# Altium PCB Programmer.PcbDoc
Units mm, origin at the board's own origin, x right, y up, seen from the top; angles counter-clockwise.
Board outline 78 x 41 mm, 2 copper layers (Top Layer, Bottom Layer); 31 components, 29 nets, 87 pads, 1210 vias.
Unrouted connection lines stored in the file: 10.
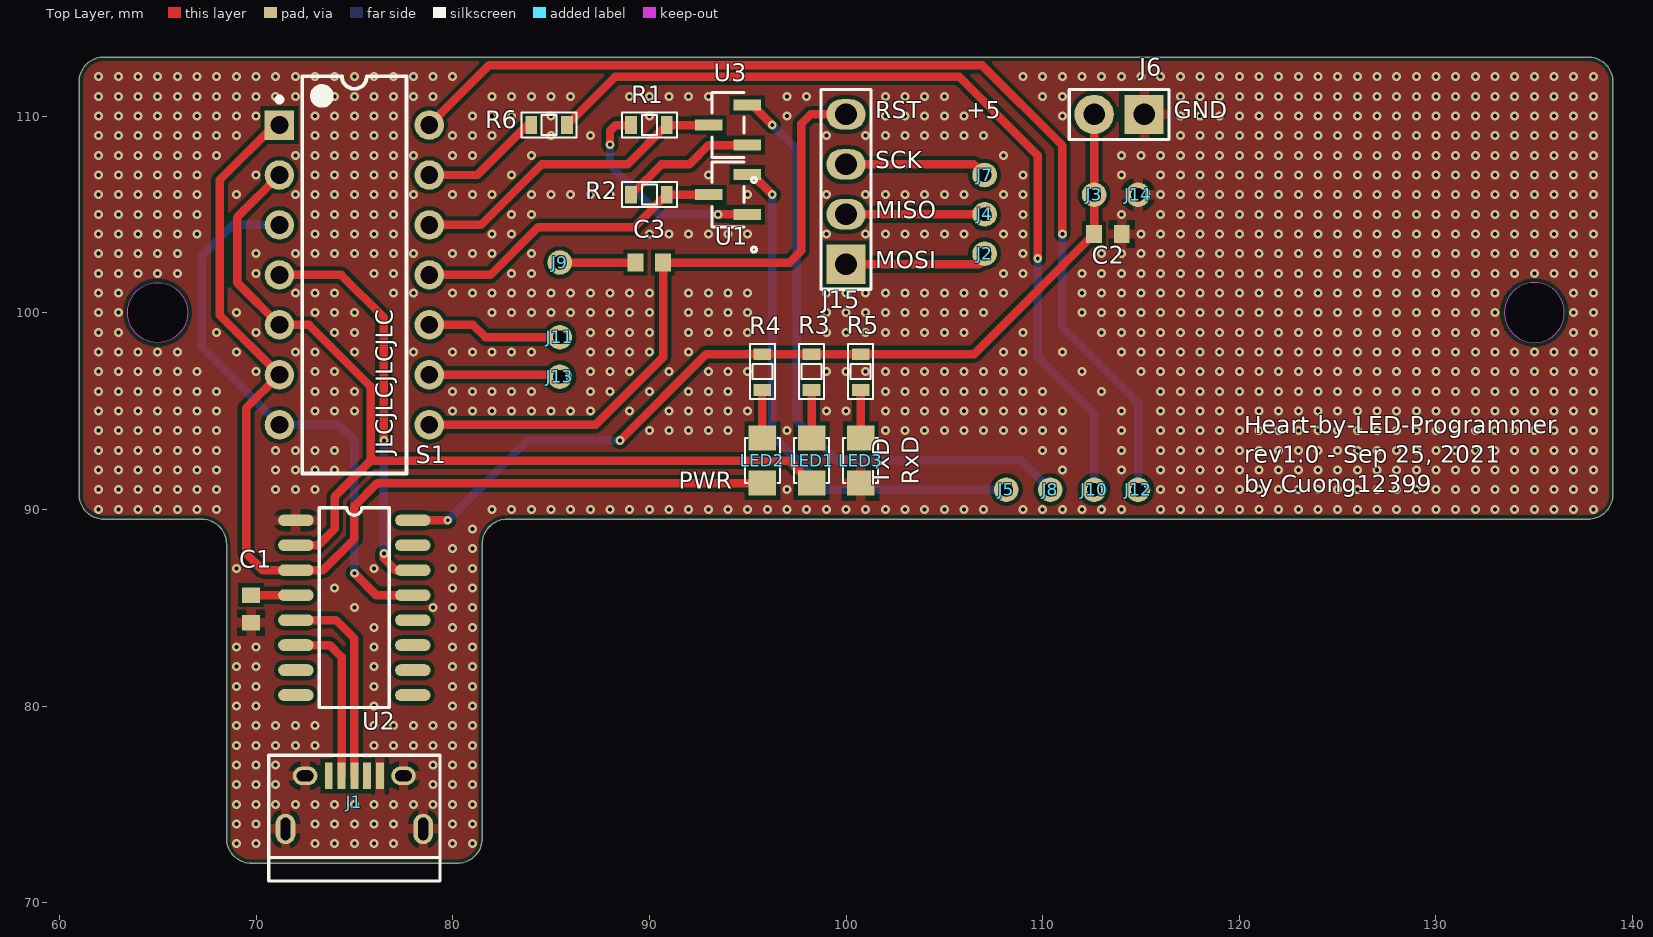
[diagram p0: Top Layer view]
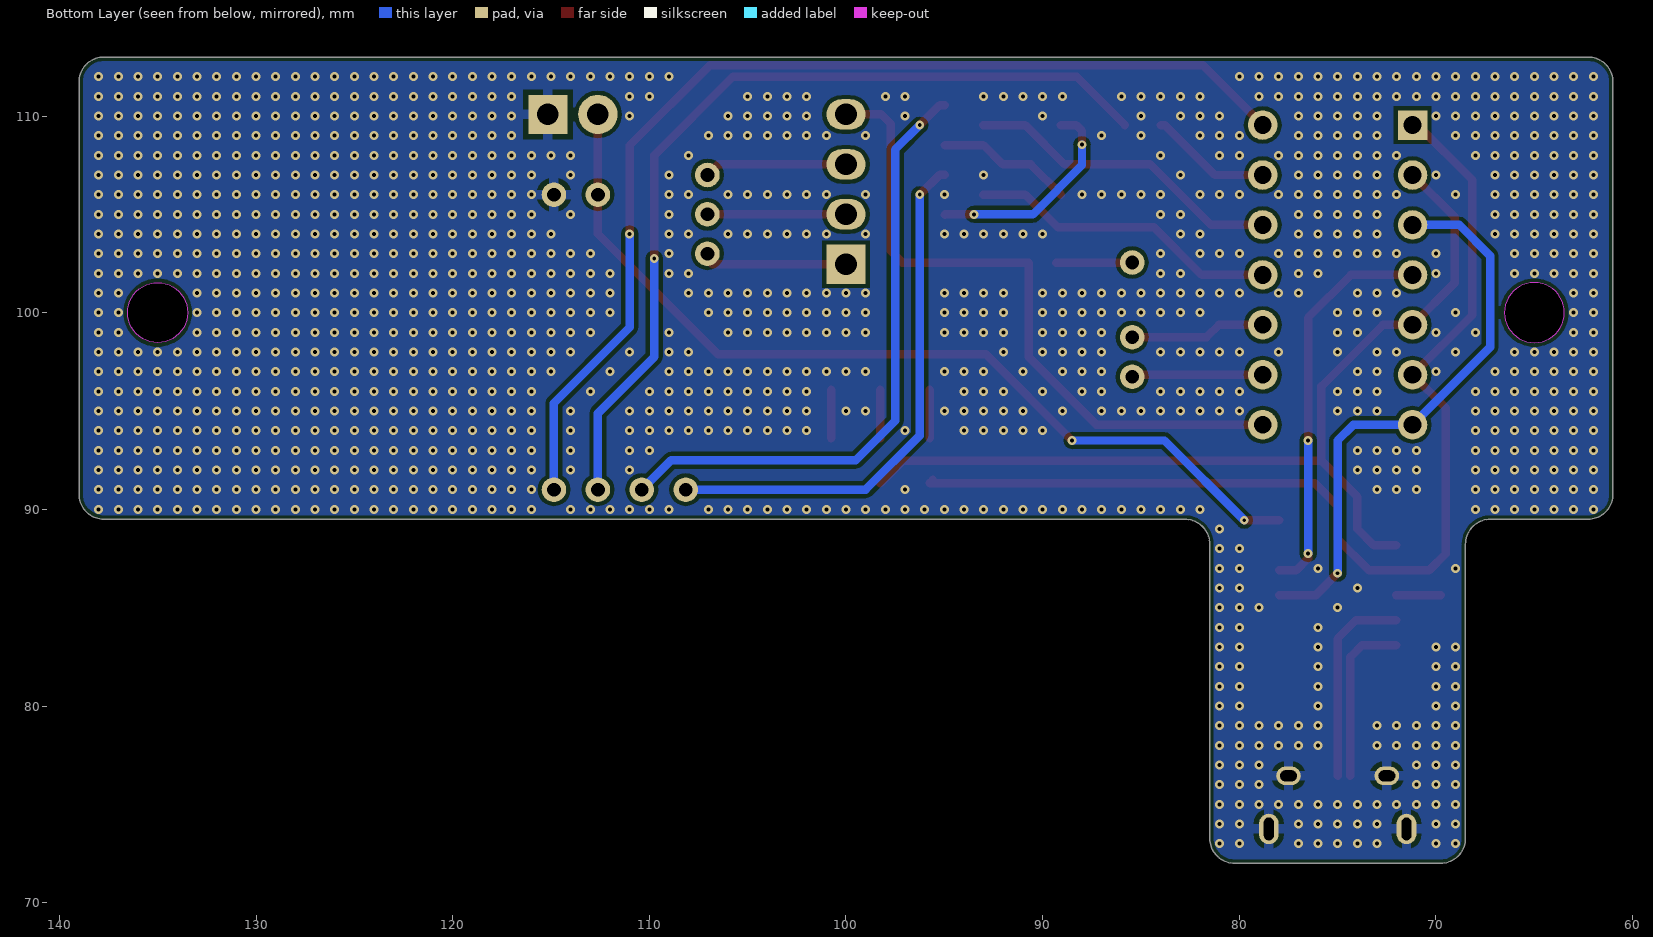
[diagram p1: Bottom Layer view, seen from below]
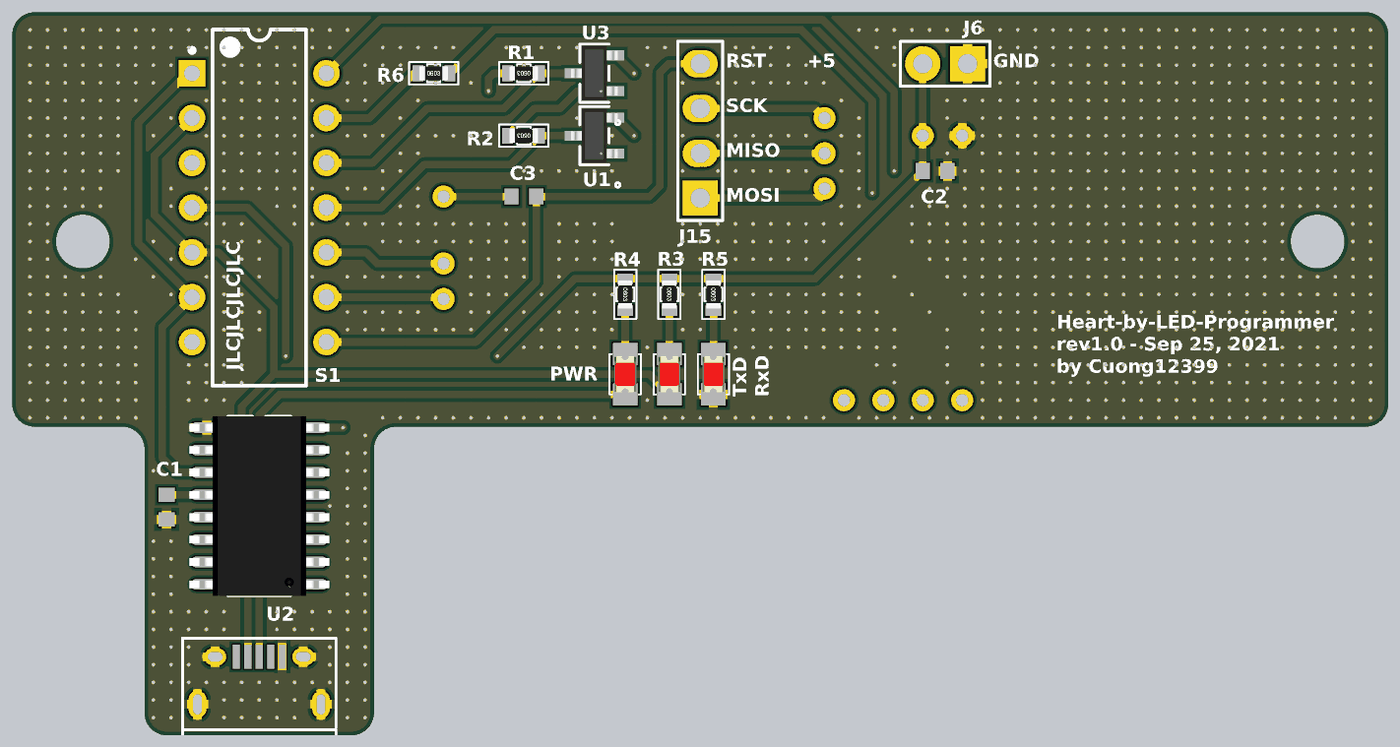
[diagram p2: 3D render of the assembled board from above, using the file's embedded part models]

## Layer stack, top to bottom
Top Solder: solder mask 0.0102, Solder Resist, Dk 3.5
Top Layer: signal copper 0.0356
Dielectric 1: dielectric 0.32, FR-4, Dk 4.8
Bottom Layer: signal copper 0.0356
Bottom Solder: solder mask 0.0102, Solder Resist, Dk 3.5

## Board outline
68.5,88.23 ccw(c67.23,88.23) 67.23,89.5 62.27,89.5 cw(c62.27,90.77) 61,90.77 61,111.73 cw(c62.27,111.73) 62.27,113 137.73,113 cw(c137.73,111.73) 139,111.73 139,90.77 cw(c137.73,90.77) 137.73,89.5 82.77,89.5 ccw(c82.77,88.23) 81.5,88.23 81.5,73.27 cw(c80.23,73.27) 80.23,72 69.77,72 cw(c69.77,73.27) 68.5,73.27
cut-out: 133.475,100 ccw(c135,100) 135,98.475 ccw(c135,100) 136.525,100 ccw(c135,100) 135,101.525 ccw(c135,100)
cut-out: 65,98.475 cw(c65,100) 63.475,100 cw(c65,100) 65,101.525 cw(c65,100) 66.525,100 cw(c65,100)

## Design rules (kind name [scope] priority, off if disabled: settings)
BoardOutlineClearance [All] p1: gap=0.2 ignorepadtopadclearanceinfootprint=FALSE except(0.4: Arc-SplitBarrior Arc-SplitContinuation Track-SplitBarrior Track-SplitContinuation SMDPad-SplitBarrior SMDPad-SplitContinuation THPad-SplitBarrior THPad-SplitContinuation Via-SplitBarrior Via-SplitContinuation Fill-SplitBarrior Fill-SplitContinuation Poly-SplitBarrior Poly-SplitContinuation Region-SplitBarrior Region-SplitContinuation Text-SplitBarrior Text-SplitContinuation)
Clearance [All] p1: gap=0.2 ignorepadtopadclearanceinfootprint=FALSE except(0.089: Arc-Arc Arc-Track Arc-SMDPad Track-Track Track-SMDPad SMDPad-SMDPad; 0.127: Arc-Via Track-Via SMDPad-Via THPad-Via Via-Via; 0.254: Arc-Text Track-Text SMDPad-Text THPad-Text Via-Text Fill-Text Poly-Text Region-Text Text-Text)
HoleSize [All] p1: absolutevalues=TRUE maxlimit=6.3 minlimit=0.2 maxpercent=80.000 minpercent=20.000
MinimumAnnularRing [All] p1: minimumring=0.076
MinimumSolderMaskSliver [All] p1: minsoldermaskwidth=0.1
PolygonConnect PolygonConnect_1 [All] p1: thpad.connectstyle=Relief thpad.reliefconductorwidth=0.508 thpad.reliefentries=4 thpad.polygonreliefangle="90 Angle" thpad.airgapwidth=0.254 smdpad.connectstyle=Relief smdpad.reliefconductorwidth=0.508 smdpad.reliefentries=4 smdpad.polygonreliefangle="90 Angle" smdpad.airgapwidth=0.254 via.connectstyle=Direct via.reliefconductorwidth=0.508 via.reliefentries=4 via.polygonreliefangle="90 Angle" via.airgapwidth=0.254
RoutingCorners [All] p1: cornerstyle=Round minsetback=2.54 maxsetback=2.54
RoutingVias [All] p1: holewidth=0.3 width=0.6 viastyle="Through Hole" minholewidth=0.2 minwidth=0.45 maxholewidth=1 maxwidth=2
SilkToSilkClearance [All] p1: silktosilkclearance=0.1
SilkToSolderMaskClearance [IsPad] p1: minsilkscreentomaskgap=0.1 clearancetoexposedcopper=TRUE
SolderMaskExpansion [All] p1: expansion=0.102
Width [All] p1: maxlimit=2.54 minlimit=0.432 preferedwidth=0.508
25 further rules are at their usual default settings.

## Components (designator, comment, footprint, x,y, rotation, side; value= is the part's Value field where it differs from the comment)
C1 "Cap Semi" 1608[0603] 69.75,84.935 r90 top value=100nF
C2 "Cap Semi" 1608[0603] 113.316,104 r180 top value=100nF
C3 "Cap Semi" 1608[0603] 90,102.55 r0 top value=100nF
J1 "USB" USB-MICRO-B-1 75,73.75 r0 top
J2 "Test Pin" P50-J1 107.047,103 r90 top
J3 "Test Pin" P50-J1 112.616,106 r90 top
J4 "Test Pin" P50-J1 107.047,105 r90 top
J5 "Test Pin" P50-J1 108.148,91 r90 top locked
J6 "Header" "Header 1x2 Pin 2.54mm" 115.156,110.08 r180 top
J7 "Test Pin" P50-J1 107.047,107 r90 top
J8 "Test Pin" P50-J1 110.382,91 r90 top locked
J9 "Test Pin" P50-J1 85.45,102.55 r90 top locked
J10 "Test Pin" P50-J1 112.616,91 r90 top locked
J11 "Test Pin" P50-J1 85.45,98.754 r90 top locked
J12 "Test Pin" P50-J1 114.85,91 r90 top locked
J13 "Test Pin" P50-J1 85.45,96.74 r90 top locked
J14 "Test Pin" P50-J1 114.85,106 r90 top
J15 "Header" "HEADER 1X4PIN 2.54mm" 100,102.46 r90 top
LED1 "LED" LED-0805-Red 98.248,93.616 r270 top value="LED 3 - 5 ly 2 Colour"
LED2 "LED" LED-0805-Red 95.748,93.616 r270 top value="LED 3 - 5 ly 2 Colour"
LED3 "LED" LED-0805-Red 100.748,93.616 r270 top value="LED 3 - 5 ly 2 Colour"
R1 "Res" RES-SMD-0603 90,109.54 r180 top value=12k
R2 "Res" RES-SMD-0603 90,106 r180 top value=12k
R3 "Res" RES-SMD-0603 98.248,97 r270 top value=10k
R4 "Res" RES-SMD-0603 95.748,97 r270 top value=10k
R5 "Res" RES-SMD-0603 100.748,97 r270 top value=10k
R6 "Res" RES-SMD-0603 84.889,109.54 r0 top value=470R
S1 "SW DIP-7" DIP-14 75,101.92 r0 top
U1 "BSS138LT1G" SOT23-3_ONS 94,106 r90 top locked
U2 "Serial IC" CH340C 75,85 r270 top
U3 "BSS138LT1G" SOT23-3_ONS 94,109.54 r90 top locked

## Footprints (in the part's own frame and the unit in brackets; to place one, negate y for a bottom-side part, rotate by r counter-clockwise, add the part's x,y. Pads: shape width x height; smd on the part's side, far side on the other; paste and mask are expansions set on the pad)
1608[0603] [mm] "Chip Capacitor, Body 1.6x0.8mm, IPC High Density"
  rect 0.8x0.9 smd: 1(-0.7,0) 2(0.7,0)
  body extent -0.87,-0.48 0.87,0.48, height 1.3
CH340C [mm]
  oval 0.6x1.8 smd: 1(-4.445,-2.972) 2(-3.175,-2.972) 3(-1.905,-2.972) 4(-0.635,-2.972) 5(0.635,-2.972) 6(1.905,-2.972) 7(3.175,-2.972) 8(4.445,-2.972) 9(4.445,2.972) 10(3.175,2.972) 11(1.905,2.972) 12(0.635,2.972) 13(-0.635,2.972) 14(-1.905,2.972) 15(-3.175,2.972) 16(-4.445,2.972)
  silkscreen extent -5.08,-1.78 5.08,1.78, body extent -5.1,-3.96 5.1,3.96, height 1.8
DIP-14 [mm] "DIP; 14 Leads; Row Spacing 7.62 mm; Pitch 2.54 mm"
  rect 1.5x1.5 hole 0.9: 1(-3.81,7.62)
  round 1.5 hole 0.9: 2(-3.81,5.08) 3(-3.81,2.54) 4(-3.81,0) 5(-3.81,-2.54) 6(-3.81,-5.08) 7(-3.81,-7.62) 8(3.81,-7.62) 9(3.81,-5.08) 10(3.81,-2.54) 11(3.81,0) 12(3.81,2.54) 13(3.81,5.08) 14(3.81,7.62)
  silkscreen extent -3.93,-10.1 2.65,10.1, body extent -3.6,-10.1 3.6,10.1, height 5.08
"Header 1x2 Pin 2.54mm" [mm]
  rect 2x2 hole 1.1 unplated: 1(0,0)
  round 2 hole 1.1 unplated: 2(2.54,0)
  silkscreen extent -1.27,-1.27 3.81,1.27
"HEADER 1X4PIN 2.54mm" [mm]
  rect 2x2 hole 1.1: 1(0,0)
  oval 1.55x2 hole 1.1: 2(2.54,0) 3(5.08,0) 4(7.62,0)
  silkscreen extent -1.27,-1.27 8.89,1.27
LED-0805-Red [mil]
  rect 50x55 smd: 1(0,0) 2(90,0)
  silkscreen extent 0,-35 90,35, body extent 5,-25 85,25, height 43
P50-J1 [mm]
  round 1.25 hole 0.7 unplated: 1(0,0)
RES-SMD-0603 [mm]
  rect 0.6x0.9 smd: 1(-0.889,0) 2(0.927,0)
  silkscreen extent -1.4,-0.64 1.4,0.64, body extent -0.8,-0.4 0.8,0.4, height 0.43
SOT23-3_ONS [mil]
  rect 22x55 smd paste+0 mask+0: 1(-40,-38.5) 2(40,-38.5) 3(0,38.5)
  silkscreen extent -115,-57 65,33, body extent -60,-52 60,52, height 44
USB-MICRO-B-1 [mm]
  rect 0.4x1.35 smd: 1(-1.3,2.7) 2(-0.65,2.7) 3(0,2.7) 4(0.65,2.7) 5(1.3,2.7)
  oval 1x1.55 hole 1.15 slot 0.5 at 0 deg: 6(-3.5,0) 6(3.5,0)
  oval 1.25x0.95 hole 0.55 slot 0.85 at 0 deg: 6(-2.5,2.7) 6(2.5,2.7)
  silkscreen extent -4.35,-2.65 4.35,3.75

## Part data
C1 C2 C3: "Capacitor (Semiconductor SIM Model)", LatestRevisionDate=29-May-2009, LatestRevisionNote="IPC-7351 Footprint Added.", PackageDescription="Chip Capacitor", PackageReference=C1206, Published=8-Jun-2000, Publisher="Altium Limited"
J1: library part USB-Micro-B_1, "MicroUSB 5pin TypeB SMD", ComponentLink1Description=Thegioiic, ComponentLink1URL=https://thegioiic.com/products/cong-usb-micro-b-dau-cai-5pin-smd-v1
J2 J3 J4 J5 J7 J8 J9 J10 J11 J12 J13 J14: library part P50-J1
J6: library part "Header 1x2Pin 2.54mm", "Header 1x2Pin 2.54mm"
J15: library part "Header 1x4Pin 2.54mm", "Header 1x4Pin 2.54mm"
LED1 LED2 LED3: library part "LED SMD"
R1 R2 R3 R4 R5 R6: library part Res-SMD, "Resistor", Manufacturer="Generic Components", Class=Passive, Published=08/06/2000, Publisher="Altium Hobart Technology Centre"
S1: "DIP Switch, 7 Position, SPST", Code_JEDEC=MO-001-AF, LatestRevisionDate=17-Jul-2002, LatestRevisionNote="Re-released for DXP Platform.", PackageReference=DIP-14, Published=24-Mar-1999, Publisher="Altium Limited"
U1 U3: "No Description Available", Built_By=EMA_Jessica, Copyright="Copyright (C) 2018 Accelerated Designs. All rights reserved", Manufacturer_Part_Number=BSS138LT1G, RefDes=RefDes, SourceLibrary=ON_Semiconductor_2019-12-30, Type=DEV, Vendor="ON Semiconductor"
U2: library part CH340C, "Transceiver USB 2.0 2Mbps SOP-16_150mil USB ICs RoHS"

## Via types
v1: diameter 0.45, hole 0.2, Top Layer to Bottom Layer, tented both sides, 1210 vias

## Nets (pads, with @x,y where several pads share a name; then routed paths per layer and width w, separated by ;. In a path a pad name is that pad's centre, name@x,y a point inside that pad or via, vN(x,y) a via of type N, cw(c..) or ccw(c..) an arc to the next point about the centre after c; other vN are vias at no path point)
+5: C2.2 J3.1 J6.2 R3.1 R4.1 R5.1 U2.16 | length 46.8
  Top Layer w0.432: U2.16 v1(79.75,89.445) ; v1(88.5,93.5) 92.889,97.889 R4.1 R3.1 R5.1 106.505,97.889 C2.2 J3.1 J6.2
  Bottom Layer w0.432: v1(79.75,89.445) 83.805,93.5 v1(88.5,93.5)
DTR: S1.3 S1.7 U2.13 | length 29.1
  Top Layer w0.432: v1(75,86.75) 76.115,85.635 U2.13
  Bottom Layer w0.432: S1.3 68.813,104.46 67.25,102.897 67.25,98.24 S1.7 74.2,94.3 75,93.5 v1(75,86.75)
ESP_DTR: R1.1 S1.12 U3.3 | length 16.3
  Top Layer w0.432: S1.12 81.444,104.46 84.524,107.54 88.889,107.54 R1.1 U3.3
ESP_EN: J5.1 U1.2 | length 27
  Top Layer w0.432: U1.2 95.234,107.016 v1(96.25,106)
  Bottom Layer w0.432: v1(96.25,106) 96.25,93.75 99,91 J5.1
ESP_IO0: J8.1 U3.2 | length 31.6
  Top Layer w0.432: U3.2 95.234,110.556 v1(96.25,109.54)
  Bottom Layer w0.432: v1(96.25,109.54) 97.5,108.29 97.5,94.5 99.5,92.5 108.882,92.5 J8.1
ESP_RTS: R2.1 S1.11 U1.3 | length 15.9
  Top Layer w0.432: S1.11 81.92,101.92 84.355,104.355 89.244,104.355 R2.1 U1.3
ESP_RxD: R6.1 S1.13 | length 6.2
  Top Layer w0.432: S1.13 81.253,107 83.793,109.54 R6.1
ESP_TxD: J12.1 S1.14 | length 54.2
  Top Layer w0.432: S1.14 81.854,112.584 106.916,112.584 111,108.5 v1(111,104)
  Bottom Layer w0.432: v1(111,104) 111,99.25 114.85,95.4 J12.1
GND: C1.1 C2.1 J1.5 J1.6 J6.1 J14.1 LED3.2 U2.1
  other v1: 69,73 70,73 73,73 74,73 75,73 76,73 77,73 80,73 81,73 69,74 70,74 73,74 74,74 75,74 76,74 77,74 80,74 81,74 69,75 70,75 71,75 72,75 73,75 74,75 75,75 76,75 77,75 78,75 79,75 80,75 81,75 69,76 70,76 71,76 79,76 80,76 81,76 69,77 70,77 71,77 79,77 80,77 81,77 69,78 70,78 71,78 72,78 73,78 76,78 77,78 78,78 79,78 80,78 81,78 69,79 70,79 71,79 72,79 73,79 76,79 77,79 78,79 79,79 80,79 81,79 69,80 70,80 76,80 80,80 81,80 69,81 70,81 76,81 80,81 81,81 69,82 70,82 76,82 80,82 81,82 69,83 70,83 76,83 80,83 81,83 76,84 80,84 81,84 75,85 79,85 80,85 81,85 74,86 80,86 81,86 69,87 76,87 80,87 81,87 80,88 81,88 81,89 62,90 63,90 64,90 65,90 66,90 67,90 68,90 82,90 83,90 84,90 85,90 86,90 87,90 88,90 89,90 90,90 91,90 92,90 93,90 94,90 95,90 96,90 97,90 98,90 99,90 100,90 101,90 102,90 103,90 104,90 105,90 106,90 107,90 109,90 110,90 111,90 112,90 113,90 114,90 116,90 117,90 118,90 119,90 120,90 121,90 122,90 123,90 124,90 125,90 126,90 127,90 128,90 129,90 130,90 131,90 132,90 133,90 134,90 135,90 136,90 137,90 138,90 62,91 63,91 64,91 65,91 66,91 67,91 68,91 71,91 72,91 73,91 97,91 116,91 117,91 118,91 119,91 120,91 121,91 122,91 123,91 124,91 125,91 126,91 127,91 128,91 129,91 130,91 131,91 132,91 133,91 134,91 135,91 136,91 137,91 138,91 62,92 63,92 64,92 65,92 66,92 67,92 68,92 71,92 72,92 73,92 74,92 111,92 114,92 116,92 117,92 118,92 119,92 120,92 121,92 122,92 123,92 124,92 125,92 126,92 127,92 128,92 129,92 130,92 131,92 132,92 133,92 134,92 135,92 136,92 137,92 138,92 62,93 63,93 64,93 65,93 66,93 67,93 68,93 71,93 72,93 73,93 74,93 110,93 111,93 114,93 116,93 117,93 118,93 119,93 120,93 121,93 122,93 123,93 124,93 125,93 126,93 127,93 128,93 129,93 130,93 131,93 132,93 133,93 134,93 135,93 136,93 137,93 138,93 62,94 63,94 64,94 65,94 66,94 67,94 68,94 90,94 91,94 92,94 93,94 94,94 97,94 102,94 103,94 104,94 105,94 106,94 107,94 108,94 109,94 110,94 111,94 114,94 116,94 117,94 118,94 119,94 120,94 121,94 122,94 123,94 124,94 125,94 126,94 127,94 128,94 129,94 130,94 131,94 132,94 133,94 134,94 135,94 136,94 137,94 138,94 62,95 63,95 64,95 65,95 66,95 67,95 68,95 73,95 74,95 75,95 80,95 81,95 82,95 83,95 84,95 85,95 86,95 87,95 89,95 91,95 92,95 93,95 94,95 95,95 99,95 100,95 102,95 103,95 104,95 105,95 106,95 107,95 108,95 109,95 110,95 111,95 114,95 116,95 117,95 118,95 119,95 120,95 121,95 122,95 123,95 124,95 125,95 126,95 127,95 128,95 129,95 130,95 131,95 132,95 133,95 134,95 135,95 136,95 137,95 138,95 62,96 63,96 64,96 65,96 66,96 67,96 68,96 73,96 74,96 75,96 80,96 81,96 82,96 83,96 84,96 87,96 88,96 90,96 92,96 93,96 94,96 102,96 103,96 104,96 105,96 106,96 107,96 108,96 109,96 110,96 113,96 116,96 117,96 118,96 119,96 120,96 121,96 122,96 123,96 124,96 125,96 126,96 127,96 128,96 129,96 130,96 131,96 132,96 133,96 134,96 135,96 136,96 137,96 138,96 62,97 63,97 64,97 65,97 66,97 67,97 70,97 73,97 74,97 87,97 88,97 89,97 91,97 93,97 94,97 95,97 99,97 100,97 101,97 102,97 103,97 104,97 105,97 106,97 107,97 108,97 109,97 112,97 115,97 116,97 117,97 118,97 119,97 120,97 121,97 122,97 123,97 124,97 125,97 126,97 127,97 128,97 129,97 130,97 131,97 132,97 133,97 134,97 135,97 136,97 137,97 138,97 62,98 63,98 64,98 65,98 66,98 69,98 72,98 73,98 75,98 78,98 80,98 81,98 82,98 83,98 84,98 87,98 88,98 89,98 90,98 92,98 108,98 109,98 111,98 114,98 115,98 116,98 117,98 118,98 119,98 120,98 121,98 122,98 123,98 124,98 125,98 126,98 127,98 128,98 129,98 130,98 131,98 132,98 133,98 134,98 135,98 136,98 137,98 138,98 62,99 63,99 68,99 70,99 74,99 75,99 87,99 88,99 89,99 90,99 92,99 93,99 94,99 95,99 99,99 100,99 101,99 102,99 103,99 104,99 105,99 106,99 109,99 113,99 114,99 115,99 116,99 117,99 118,99 119,99 120,99 121,99 122,99 123,99 124,99 125,99 126,99 127,99 128,99 129,99 130,99 131,99 132,99 133,99 137,99 138,99 62,100 63,100 69,100 73,100 74,100 75,100 82,100 83,100 84,100 85,100 86,100 87,100 88,100 89,100 90,100 92,100 93,100 94,100 95,100 99,100 100,100 101,100 102,100 103,100 104,100 105,100 106,100 107,100 112,100 113,100 114,100 115,100 116,100 117,100 118,100 119,100 120,100 121,100 122,100 123,100 124,100 125,100 126,100 127,100 128,100 129,100 130,100 131,100 132,100 133,100 137,100 138,100 62,101 63,101 72,101 73,101 74,101 77,101 78,101 80,101 81,101 82,101 83,101 84,101 85,101 86,101 87,101 88,101 89,101 90,101 92,101 93,101 94,101 95,101 99,101 100,101 101,101 102,101 103,101 104,101 105,101 106,101 107,101 108,101 112,101 113,101 114,101 115,101 116,101 117,101 118,101 119,101 120,101 121,101 122,101 123,101 124,101 125,101 126,101 127,101 128,101 129,101 130,101 131,101 132,101 133,101 137,101 138,101 62,102 63,102 64,102 65,102 66,102 70,102 76,102 77,102 83,102 84,102 108,102 109,102 112,102 113,102 114,102 115,102 116,102 117,102 118,102 119,102 120,102 121,102 122,102 123,102 124,102 125,102 126,102 127,102 128,102 129,102 130,102 131,102 132,102 133,102 134,102 135,102 136,102 137,102 138,102 62,103 63,103 64,103 65,103 66,103 70,103 72,103 73,103 74,103 75,103 76,103 77,103 78,103 80,103 81,103 82,103 84,103 109,103 113,103 114,103 115,103 116,103 117,103 118,103 119,103 120,103 121,103 122,103 123,103 124,103 125,103 126,103 127,103 128,103 129,103 130,103 131,103 132,103 133,103 134,103 135,103 136,103 137,103 138,103 62,104 63,104 64,104 65,104 66,104 67,104 73,104 74,104 75,104 76,104 77,104 82,104 83,104 90,104 91,104 92,104 93,104 94,104 95,104 99,104 101,104 102,104 103,104 104,104 105,104 106,104 108,104 109,104 115,104 116,104 117,104 118,104 119,104 120,104 121,104 122,104 123,104 124,104 125,104 126,104 127,104 128,104 129,104 130,104 131,104 132,104 133,104 134,104 135,104 136,104 137,104 138,104 62,105 63,105 64,105 65,105 66,105 67,105 73,105 74,105 75,105 76,105 77,105 83,105 84,105 109,105 114,105 116,105 117,105 118,105 119,105 120,105 121,105 122,105 123,105 124,105 125,105 126,105 127,105 128,105 129,105 130,105 131,105 132,105 133,105 134,105 135,105 136,105 137,105 138,105 62,106 63,106 64,106 65,106 66,106 67,106 69,106 72,106 73,106 74,106 75,106 76,106 77,106 78,106 80,106 81,106 82,106 84,106 85,106 86,106 87,106 88,106 95,106 99,106 101,106 102,106 103,106 104,106 105,106 106,106 108,106 109,106 116,106 117,106 118,106 119,106 120,106 121,106 122,106 123,106 124,106 125,106 126,106 127,106 128,106 129,106 130,106 131,106 132,106 133,106 134,106 135,106 136,106 137,106 138,106 62,107 63,107 64,107 65,107 66,107 67,107 70,107 73,107 74,107 75,107 76,107 77,107 83,107 93,107 109,107 114,107 116,107 117,107 118,107 119,107 120,107 121,107 122,107 123,107 124,107 125,107 126,107 127,107 128,107 129,107 130,107 131,107 132,107 133,107 134,107 135,107 136,107 137,107 138,107 62,108 63,108 64,108 65,108 66,108 67,108 68,108 72,108 73,108 74,108 75,108 76,108 77,108 78,108 80,108 81,108 84,108 108,108 114,108 115,108 116,108 117,108 118,108 119,108 120,108 121,108 122,108 123,108 124,108 125,108 126,108 127,108 128,108 129,108 130,108 131,108 132,108 133,108 134,108 135,108 136,108 137,108 138,108 62,109 63,109 64,109 65,109 66,109 67,109 68,109 69,109 73,109 74,109 75,109 76,109 77,109 80,109 81,109 82,109 85,109 87,109 99,109 101,109 102,109 103,109 104,109 105,109 106,109 107,109 117,109 118,109 119,109 120,109 121,109 122,109 123,109 124,109 125,109 126,109 127,109 128,109 129,109 130,109 131,109 132,109 133,109 134,109 135,109 136,109 137,109 138,109 62,110 63,110 64,110 65,110 66,110 67,110 68,110 69,110 70,110 73,110 74,110 75,110 76,110 77,110 81,110 82,110 83,110 85,110 90,110 97,110 102,110 103,110 104,110 105,110 106,110 111,110 117,110 118,110 119,110 120,110 121,110 122,110 123,110 124,110 125,110 126,110 127,110 128,110 129,110 130,110 131,110 132,110 133,110 134,110 135,110 136,110 137,110 138,110 62,111 63,111 64,111 65,111 66,111 67,111 68,111 69,111 70,111 71,111 72,111 73,111 74,111 75,111 76,111 77,111 78,111 79,111 82,111 83,111 84,111 85,111 86,111 89,111 90,111 91,111 92,111 93,111 97,111 98,111 102,111 103,111 104,111 105,111 110,111 111,111 117,111 118,111 119,111 120,111 121,111 122,111 123,111 124,111 125,111 126,111 127,111 128,111 129,111 130,111 131,111 132,111 133,111 134,111 135,111 136,111 137,111 138,111 62,112 63,112 64,112 65,112 66,112 67,112 68,112 69,112 70,112 71,112 72,112 73,112 74,112 75,112 76,112 77,112 78,112 79,112 80,112 109,112 110,112 111,112 112,112 113,112 114,112 115,112 116,112 117,112 118,112 119,112 120,112 121,112 122,112 123,112 124,112 125,112 126,112 127,112 128,112 129,112 130,112 131,112 132,112 133,112 134,112 135,112 136,112 137,112 138,112
MCU_MISO: J4.1 J15.2 | length 7
  Top Layer w0.432: J15.2 J4.1
MCU_MOSI: J2.1 J15.1 | length 7.4
  Top Layer w0.432: J15.1 106.778,102.46 107.047,102.729 J2.1
MCU_RST: C3.2 J15.4 S1.8 | length 34.3
  Top Layer w0.432: S1.8 87.264,94.3 90.7,97.736 C3.2 97.131,102.55 97.717,103.136 97.717,109.599 98.198,110.08 J15.4
MCU_RST_1: C3.1 J9.1 | length 3.9
  Top Layer w0.432: J9.1 C3.1
MCU_RxD: J11.1 S1.10 | length 6.9
  Top Layer w0.432: S1.10 81.04,99.38 81.666,98.754 J11.1
MCU_SCK: J7.1 J15.3 | length 7.3
  Top Layer w0.432: J15.3 106.507,107.54 J7.1
MCU_TxD: J13.1 S1.9 | length 6.7
  Top Layer w0.432: S1.9 85.35,96.84 J13.1
NetC1_2: C1.2 U2.4 | length 2.3
  Top Layer w0.432: C1.2 U2.4
NetJ10_1: J10.1 R6.2 | length 44.8
  Top Layer w0.432: R6.2 88.276,112 105.75,112 109.75,108 v1(109.75,102.75)
  Bottom Layer w0.432: v1(109.75,102.75) 109.75,97.75 112.616,94.884 J10.1
NetLED1_1: LED1.1 R3.2 | length 2.5
  Top Layer w0.432: LED1.1 R3.2
NetLED2_1: LED2.1 R4.2 | length 2.5
  Top Layer w0.432: LED2.1 R4.2
NetLED3_1: LED3.1 R5.2 | length 2.5
  Top Layer w0.432: LED3.1 R5.2
NetR1_2: R1.2 U1.1 | length 11
  Top Layer w0.432: v1(88,108.54) 88,109.25 88.29,109.54 R1.2 ; v1(93.5,105) 94.962,105 U1.1
  Bottom Layer w0.432: v1(88,108.54) 88,107.5 90.5,105 v1(93.5,105)
NetR2_2: R2.2 U3.1 | length 7
  Top Layer w0.432: R2.2 90.613,107.54 92.027,107.54 93.011,108.524 U3.1
RTS: S1.4 U2.14 | length 20.2
  Top Layer w0.432: S1.4 74.33,101.92 76.5,99.75 v1(76.5,93.5) ; v1(76.5,87.75) 76.5,87.5 77.095,86.905 U2.14
  Bottom Layer w0.432: v1(76.5,87.75) v1(76.5,93.5)
RxD: LED1.2 S1.2 S1.5 U2.2 | length 48.5
  Top Layer w0.432: S1.2 69.049,104.859 69.049,101.521 S1.5 72.696,99.38 75.826,96.25 75.826,92.467 ; U2.2 73.175,88.175 74,89 74,90.641 75.826,92.467 ; LED1.2 97.111,92.467 75.826,92.467
TxD: LED2.2 S1.1 S1.6 U2.3 | length 54.8
  Top Layer w0.432: S1.1 70.951,109.54 68.149,106.738 68.149,99.881 S1.6 69.5,95.15 69.5,87.75 70.345,86.905 U2.3 73.405,86.905 75,88.5 75,90.174 76.156,91.33 LED2.2 LED2.2@95.578,91.5
UD+: J1.3 U2.5 | length 10.3
  Top Layer w0.432: U2.5 74.06,84.365 75,83.425 J1.3
UD-: J1.2 U2.6 | length 8.6
  Top Layer w0.432: U2.6 73.75,83.095 74.35,82.495 J1.2
VCC: J1.1
pads on no net: J1.4 U2.7 U2.8 U2.9 U2.10 U2.11 U2.12 U2.15

## Polygon pours and split planes (outlines as drawn)
GND on Top Layer (solid, pour order 0): 68.5,88.23 ccw(c67.23,88.23) 67.23,89.5 62.27,89.5 cw(c62.27,90.77) 61,90.77 61,111.73 cw(c62.27,111.73) 62.27,113 137.73,113 cw(c137.73,111.73) 139,111.73 139,90.77 cw(c137.73,90.77) 137.73,89.5 82.77,89.5 ccw(c82.77,88.23) 81.5,88.23 81.5,73.27 cw(c80.23,73.27) 80.23,72 69.77,72 cw(c69.77,73.27) 68.5,73.27
GND on Bottom Layer (solid, pour order 2): 68.5,88.23 ccw(c67.23,88.23) 67.23,89.5 62.27,89.5 cw(c62.27,90.77) 61,90.77 61,111.73 cw(c62.27,111.73) 62.27,113 137.73,113 cw(c137.73,111.73) 139,111.73 139,90.77 cw(c137.73,90.77) 137.73,89.5 82.77,89.5 ccw(c82.77,88.23) 81.5,88.23 81.5,73.27 cw(c80.23,73.27) 80.23,72 69.77,72 cw(c69.77,73.27) 68.5,73.27

## Silkscreen, mask and mechanical layers (free items; w line width, h text height)
Top Overlay:
  text "RST" at 101.5,109.58 h1.5
  text "+5" at 106.116,109.58 h1.5
  text "GND" at 116.656,109.58 h1.5
  text "SCK" at 101.5,107.04 h1.5
  text "MISO" at 101.5,104.5 h1.5
  text "MOSI" at 101.5,101.96 h1.5
  text "JLCJLCJLCJLC" at 77.25,92.75 h1.5 r90
  text "TxD / RxD" at 104,91.25 h1.5 r90
  text "PWR" at 91.5,90.75 h1.5
  text "Heart-by-LED-Programmer / rev1.0 - Sep 25, 2021 / by Cuong12399" at 120.25,90.576 h1.5
Mechanical 1:
  circle w0.025: c65,100 r1.525
  circle w0.025: c135,100 r1.525
  lines w0.025: 61,90.77 ccw(c62.27,90.77) 62.27,89.5 67.23,89.5 cw(c67.23,88.23) 68.5,88.23 68.5,86.5 68.5,73.27 ccw(c69.77,73.27) 69.77,72 80.23,72 ccw(c80.23,73.27) 81.5,73.27 81.5,88.23 cw(c82.77,88.23) 82.77,89.5 137.73,89.5 ccw(c137.73,90.77) 139,90.77 139,111.73 ccw(c137.73,111.73) 137.73,113 62.27,113 ccw(c62.27,111.73) 61,111.73 61,90.77

## Text inside footprints (layer, text, board x,y; h text height)
U1: Mechanical 7 "0.055in/1.397mm" at 94.317,96.665 h0.64 r90; Mechanical 7 "0.12in/3.048mm" at 87.091,103.777 h0.64 r90; Mechanical 7 "0.02in/0.508mm" at 89.631,103.777 h0.64 r90; Mechanical 7 "0.08in/2.032mm" at 99.004,103.777 h0.64 r90; Mechanical 7 "0.027in/0.686mm" at 93.34,109.937 h0.64 r90; Mechanical 7 "0.104in/2.642mm" at 94.317,111.842 h0.64 r90; Mechanical 7 "Alt 2 Padstyle: OX90Y60D30P" at 107.741,97.427 h1.27 r90; Mechanical 7 "Alt 1 Padstyle: OX60Y90D30P" at 105.836,97.427 h1.27 r90; Mechanical 7 "Bottom Padstyle: RX22Y55D0T" at 103.931,97.427 h1.27 r90; Mechanical 7 "Top Padstyle: RX22Y55D0T" at 102.026,98.38 h1.27 r90
U3: Mechanical 7 "0.055in/1.397mm" at 94.317,100.205 h0.64 r90; Mechanical 7 "0.12in/3.048mm" at 87.091,107.317 h0.64 r90; Mechanical 7 "0.02in/0.508mm" at 89.631,107.317 h0.64 r90; Mechanical 7 "0.08in/2.032mm" at 99.004,107.317 h0.64 r90; Mechanical 7 "0.027in/0.686mm" at 93.34,113.477 h0.64 r90; Mechanical 7 "0.104in/2.642mm" at 94.317,115.382 h0.64 r90; Mechanical 7 "Alt 2 Padstyle: OX90Y60D30P" at 107.741,100.967 h1.27 r90; Mechanical 7 "Alt 1 Padstyle: OX60Y90D30P" at 105.836,100.967 h1.27 r90; Mechanical 7 "Bottom Padstyle: RX22Y55D0T" at 103.931,100.967 h1.27 r90; Mechanical 7 "Top Padstyle: RX22Y55D0T" at 102.026,101.92 h1.27 r90